# Altium PCB PCB1.PcbDoc
Units mil, origin at the board's own origin, x right, y up, seen from the top; angles counter-clockwise.
Board outline 2975 x 2360 mil, 2 copper layers (Top Layer, Bottom Layer); 81 components, 59 nets, 305 pads, 135 vias.
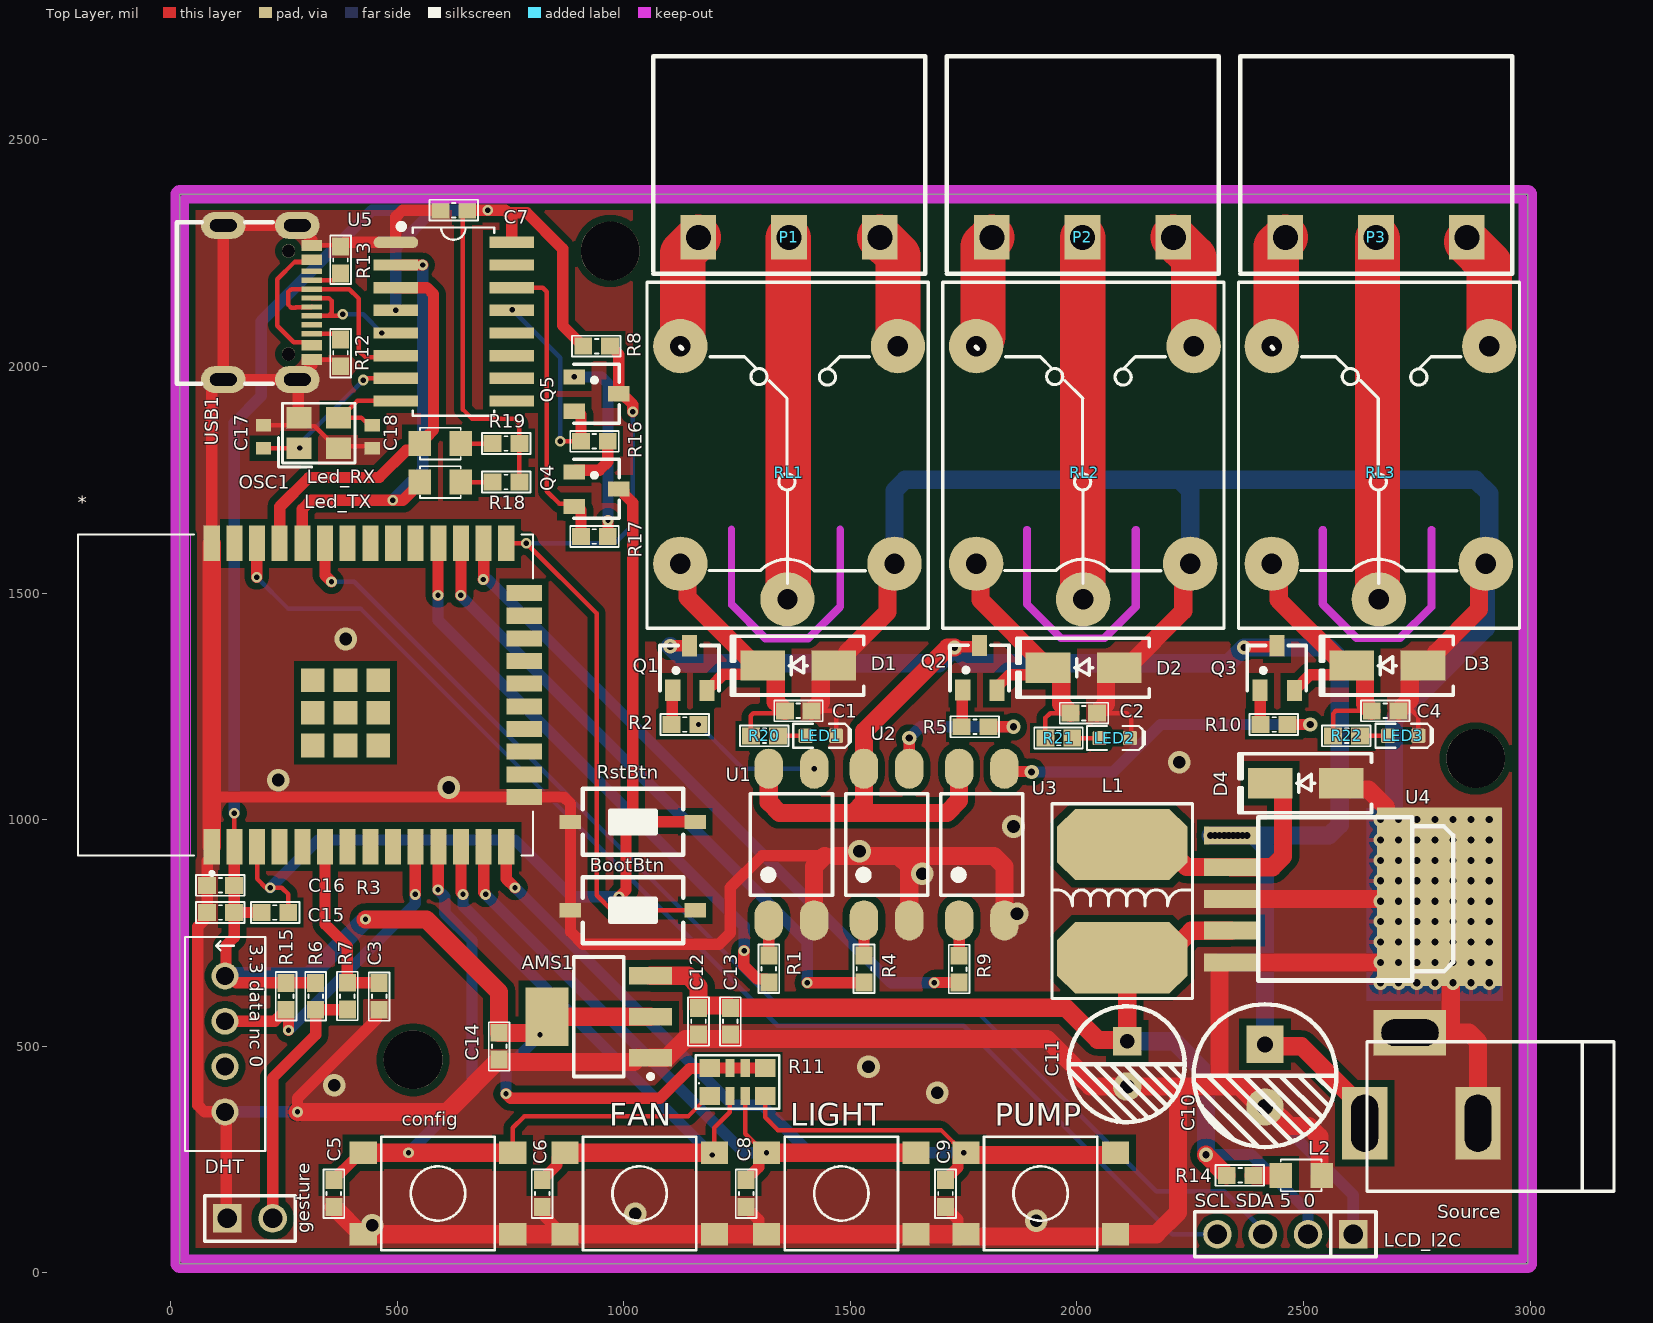
[diagram p0: Top Layer view]
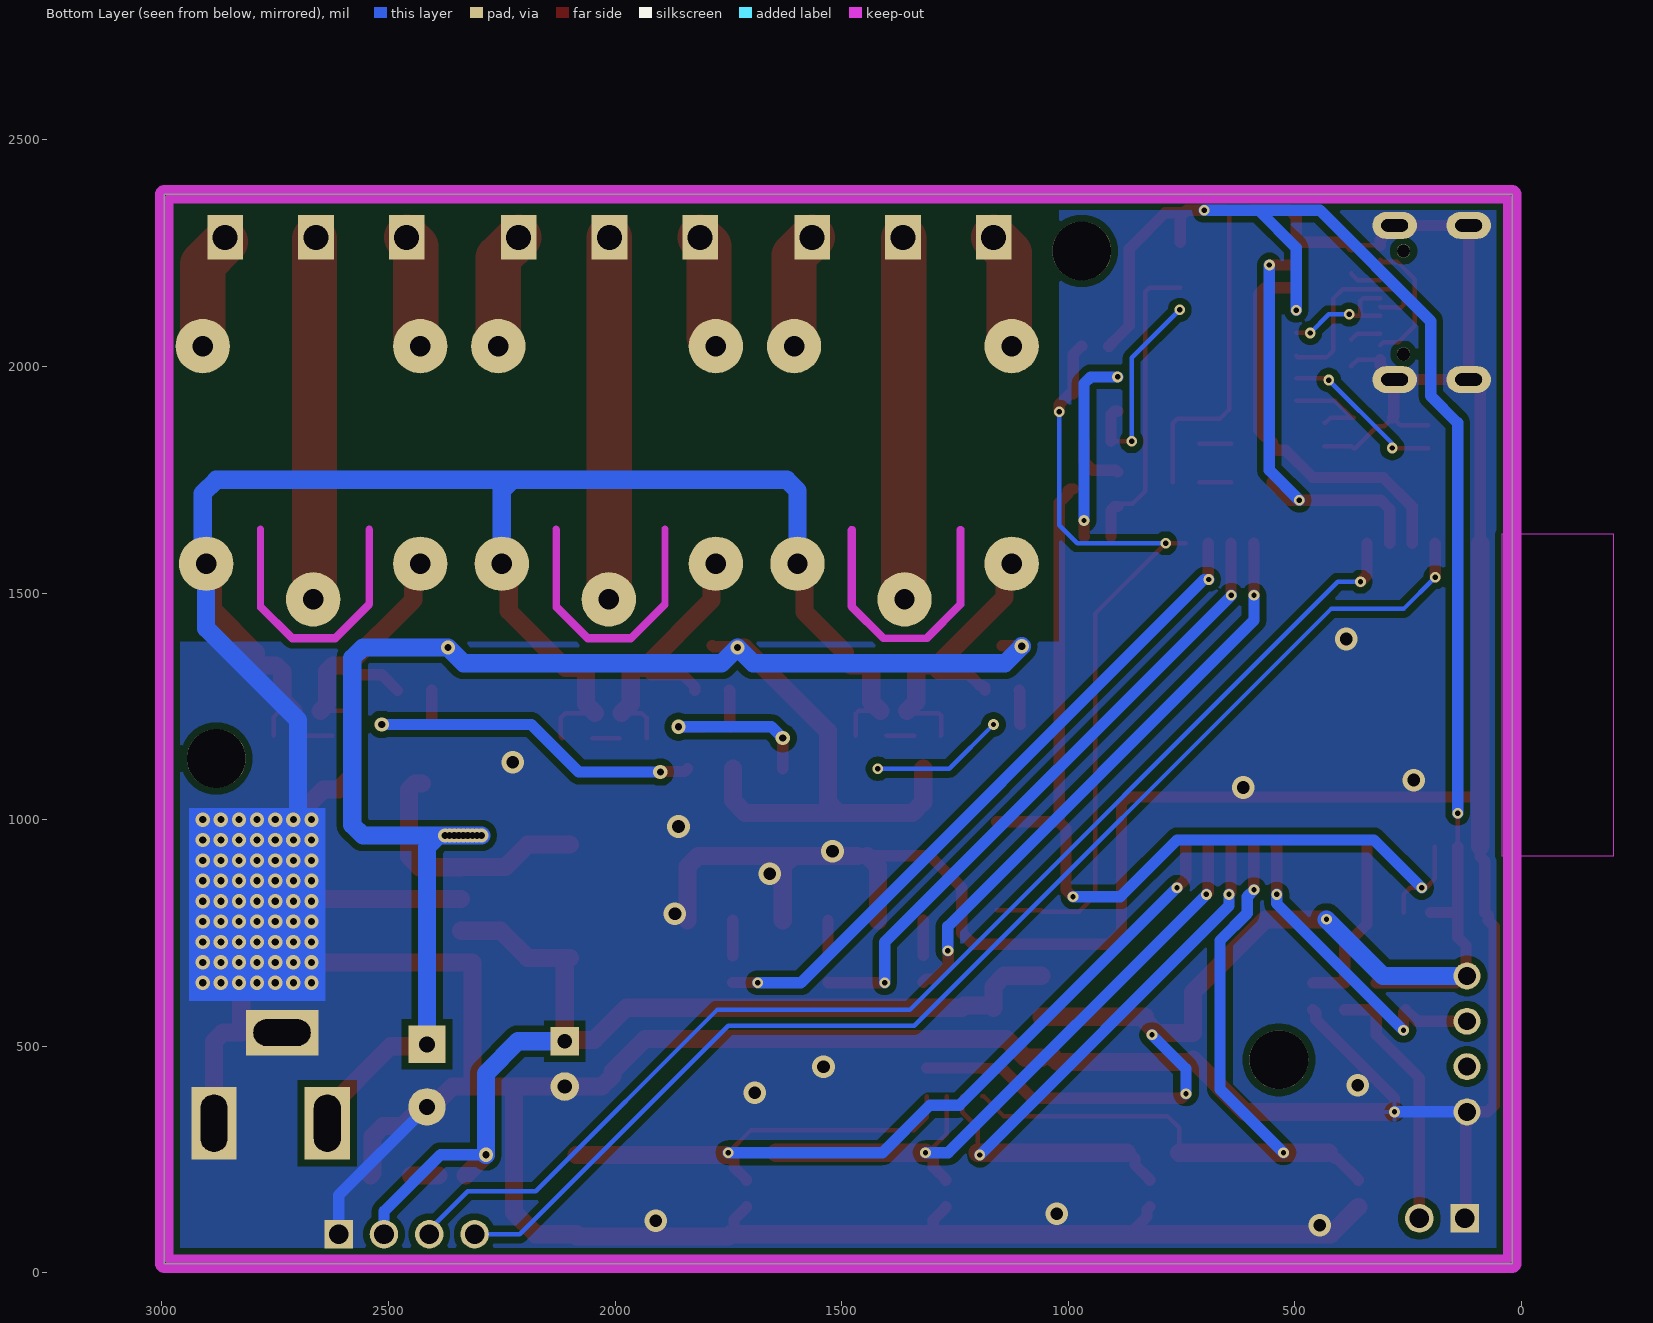
[diagram p1: Bottom Layer view, seen from below]

## Layer stack, top to bottom
Top Solder: solder mask 0.4, Solder Resist, Dk 3.5
Top Layer: signal copper 1.4
Dielectric 1: dielectric 12.6, FR-4, Dk 4.8
Bottom Layer: signal copper 1.4
Bottom Solder: solder mask 0.4, Solder Resist, Dk 3.5

## Board outline
20,2380 20,20 2995,20 2995,2380
cut-out: 2612.19,1394.69 2537.18,1469.7 cw(c2542.48,1474.99) 2534.98,1475 2534.98,1640 cw(c2542.5,1640) 2550.02,1640 2550.02,1478.11 2620.61,1407.51 2709.39,1407.51 2774.98,1473.11 2774.98,1640 cw(c2782.5,1640) 2790.02,1640 2790.02,1470 cw(c2782.5,1470) 2787.81,1464.69 2717.81,1394.68 cw(c2712.51,1399.98) 2712.5,1392.49 2617.5,1392.49 cw(c2617.5,1400)
cut-out: 1307.2,1394.68 ccw(c1312.49,1399.98) 1312.5,1392.49 1407.5,1392.49 ccw(c1407.5,1400) 1412.81,1394.69 1482.82,1464.7 ccw(c1477.52,1469.99) 1485.01,1470 1485.01,1640 ccw(c1477.5,1640) 1469.99,1640 1469.99,1473.11 1404.39,1407.51 1315.61,1407.51 1245.01,1478.11 1245.01,1640 ccw(c1237.5,1640) 1229.99,1640 1229.99,1475 ccw(c1237.5,1475) 1232.19,1469.69
cut-out: 1959.69,1394.69 1884.68,1469.7 cw(c1889.98,1474.99) 1882.48,1475 1882.48,1640 cw(c1890,1640) 1897.52,1640 1897.52,1478.11 1968.11,1407.51 2056.89,1407.51 2122.48,1473.11 2122.48,1640 cw(c2130,1640) 2137.52,1640 2137.52,1470 cw(c2130,1470) 2135.31,1464.69 2065.31,1394.68 cw(c2060.01,1399.98) 2060,1392.49 1965,1392.49 cw(c1965,1400)
cut-out: 1959.69,1394.69 1884.68,1469.7 cw(c1889.98,1474.99) 1882.48,1475 1882.48,1640 cw(c1890,1640) 1897.52,1640 1897.52,1478.11 1968.11,1407.51 2056.89,1407.51 2122.48,1473.11 2122.48,1640 cw(c2130,1640) 2137.52,1640 2137.52,1470 cw(c2130,1470) 2135.31,1464.69 2065.31,1394.68 cw(c2060.01,1399.98) 2060,1392.49 1965,1392.49 cw(c1965,1400)

## Design rules (kind name [scope] priority, off if disabled: settings)
Clearance [All] p1: gap=15 ignorepadtopadclearanceinfootprint=FALSE
PlaneConnect [All] p1: planeconnectstyle=Direct reliefexpansion=20 reliefentries=4 reliefconductorwidth=10 reliefairgap=10
PolygonConnect [All] p1: thpad.connectstyle=Direct thpad.reliefconductorwidth=10 thpad.reliefentries=4 thpad.polygonreliefangle="90 Angle" thpad.airgapwidth=10 smdpad.connectstyle=Direct smdpad.reliefconductorwidth=10 smdpad.reliefentries=4 smdpad.polygonreliefangle="90 Angle" smdpad.airgapwidth=10 via.connectstyle=Relief via.reliefconductorwidth=10 via.reliefentries=4 via.polygonreliefangle="90 Angle" via.airgapwidth=10
RoomDefinition Sheet1 [InComponentClass('Sheet1')] p1: confinementstyle=ConfineIn formatcopy=TRUE lockcomponents=FALSE outline -2240,-2505 -240,-2505 -240,-1505 -2240,-1505
RoutingVias [All] p1: holewidth=13.78 width=27.56 viastyle="Through Hole" minholewidth=11.81 minwidth=23.62 maxholewidth=15.75 maxwidth=31.5
SolderMaskExpansion [All] p1: expansion=4 istentingtop=FALSE
Width [All] p1: maxlimit=40 minlimit=10 preferedwidth=25
29 further rules are at their usual default settings.

## Components (designator, comment, footprint, x,y, rotation, side; value= is the part's Value field where it differs from the comment)
* "ESP32 WROOM 32" ESP32-WROOM-32D 297.72,1275 r90 top
AMS1 "AMS1117-3.3V" SOT223 945,565 r90 top value="AMS1117-3.3V SOT223"
BootBtn "Nut Nhan 2 Chan SMD 3x6x2.5" "Nut Nhan 2 Chan SMD 3x6x2.5" 1020,800 r0 top
C1 "470pF" "tu 0603" 1385,1240 r0 top
C2 "470pF" "tu 0603" 2015,1235 r0 top
C3 "102" "tu 0603" 460,610 r270 top
C4 "470pF" "tu 0603" 2680,1240 r0 top
C5 "102" "tu 0603" 360,175 r270 top
C6 "102" "tu 0603" 820,175 r270 top
C7 "104" "tu 0603" 625,2345 r180 top
C8 "102" "tu 0603" 1270,175 r270 top
C9 "102" "tu 0603" 1710,175 r270 top
C10 "330uF" "tu hoa 8mm" 2415,435 r270 top
C11 "220uF" "tu hoa 6.5mm" 2110,460 r270 top
C12 "104" "tu 0603" 1165,555 r270 top
C13 "103" "tu 0603" 1235,555 r270 top
C14 "104" "tu 0603" 725,500 r270 top
C15 "103" "tu 0603" 110,795 r180 top
C16 "103" "tu 0603" 110,855 r180 top
C17 "22pF" CAPC1608X09L 205,1845 r90 top
C18 "22pF" CAPC1608X09L 445,1845 r270 top
config "QuatButton" "Nut Nhan 4 Chan SMD 6x6" 590,175 r180 top (schematic designator BT1)
D1 "SS34" "DIODE SMA" 1385,1340 r180 top
D2 "SS34" "DIODE SMA" 2015,1335 r180 top
D3 "SS34" "DIODE SMA" 2685,1340 r180 top
D4 "SS34" "DIODE SMA" 2505,1080 r180 top
DHT "DHT11" SENSOR-DHT11 120,505 r270 top (schematic designator SENS-1)
FAN "DenButton" "Nut Nhan 4 Chan SMD 6x6" 1035,175 r180 top (schematic designator BT2)
gesture "JP 1x2 2.54" "JP 1x2 DT" 125,120 r0 top (schematic designator JP1)
L1 "47uH SMD" "Cuon Cam 7x7x5" 2100,970 r180 top
L2 "LED 0805" LED-0805-Red 2450,215 r0 top
LCD_I2C "LCD" "JP 1x4 DT" 2610,85 r180 top (schematic designator JP?)
LED1 "Green" LED-0603-GREEN 1435,1185 r0 top
LED2 "Green" LED-0603-GREEN 2083.46,1180 r0 top
LED3 "Green" LED-0603-GREEN 2720,1185 r0 top
Led_RX "LED 0805" LED-0805-Red 640,1830 r180 top (schematic designator L4)
Led_TX "LED 0805" LED-0805-Red 640,1745 r180 top (schematic designator L3)
LIGHT "BomButton" "Nut Nhan 4 Chan SMD 6x6" 1480,175 r180 top (schematic designator BT3)
OSC1 "OSC_SMD" "3525 OSC" 325,1855 r0 top
P1 "Bom" "CON 3 3EDG5.08" 1164.5,2285 r0 top
P2 "Quat" "CON 3 3EDG5.08" 1812.25,2285 r0 top
P3 "Den" "CON 3 3EDG5.08" 2460,2285 r0 top
PUMP "ConfigWifi" "Nut Nhan 4 Chan SMD 6x6" 1920,175 r180 top (schematic designator BT4)
Q1 "BC817" SOT-23 1145,1334.21 r0 top value=C9014
Q2 "BC817" SOT-23 1785,1335 r0 top value=C9014
Q3 "BC817" SOT-23 2441.2,1334.21 r0 top value=C9014
Q4 "BC817" SOT-23 940,1730 r270 top value=C9014
Q5 "BC817" SOT-23 940,1940 r270 top value=C9014
R1 "1k" "tro smd 0603" 1320,670.47 r90 top
R2 "4.7k" "tro smd 0603" 1135,1210 r180 top
R3 "10k" "tro smd 0603" 230,795 r0 top
R4 "1k" "tro smd 0603" 1530,670.47 r90 top
R5 "4.7k" "tro smd 0603" 1775,1205 r180 top
R6 "10k" "tro smd 0603" 320,610 r90 top
R7 "1k" "tro smd 0603" 390,610.47 r90 top
R8 "10k" "tro smd 0603" 940,2045 r180 top
R9 "1k" "tro smd 0603" 1740,670 r90 top
R10 "4.7k" "tro smd 0603" 2435,1210 r180 top
R11 "10k" "tro bang 0603 4" 1250,420 r90 top
R12 "5k1" "tro smd 0603" 375,2030 r270 top
R13 "5k1" "tro smd 0603" 375,2235 r90 top
R14 "1k" "tro smd 0603" 2360,215 r180 top
R15 "10k" "tro smd 0603" 255,610 r90 top
R16 "10k" "tro smd 0603" 935,1835 r0 top
R17 "10k" "tro smd 0603" 935,1625 r0 top
R18 "2k" "tro smd 0603" 740,1745 r0 top
R19 "2k" "tro smd 0603" 740,1830 r0 top
R20 "2k" "tro smd 0603" 1310.47,1185 r180 top
R21 "2k" "tro smd 0603" 1960,1180 r180 top
R22 "2k" "tro smd 0603" 2595,1185 r180 top
RL1 "Relay" "Relay 5 Chan SRD" 1361.22,1485.94 r90 top
RL2 "Relay" "Relay 5 Chan SRD" 2013.72,1485.94 r90 top
RL3 "Relay" "Relay 5 Chan SRD" 2666.22,1485.94 r90 top
RstBtn "Nut Nhan 2 Chan SMD 3x6x2.5" "Nut Nhan 2 Chan SMD 3x6x2.5" 1020,995 r0 top
Source "JACK DC 5.5" "JACK DC 5.5" 2760,430 r180 top locked value="Jac DC" (schematic designator "JACK DC1")
U1 "OPTO PC817 SMD" SOP4 1370,945 r90 top value=PC817
U2 "OPTO PC817 SMD" SOP4 1580,945 r90 top value=PC817
U3 "OPTO PC817 SMD" SOP4 1790,945 r90 top value=PC817
U4 "LM2576HVS 5.0V SMD" TO263-5 2570,825 r270 top
U5 "CH340C" SOIC16_50_284_25X90_SMT 625,2100 r0 top
USB1 "Type C 16P" "Type C 16P" 161.67,2158.03 r270 top

## Footprints (in the part's own frame and the unit in brackets; to place one, negate y for a bottom-side part, rotate by r counter-clockwise, add the part's x,y. Pads: shape width x height; smd on the part's side, far side on the other; paste and mask are expansions set on the pad)
"3525 OSC" [mm]
  rect 1.4x1.2 smd: 1(-1.053,-0.899) 2(1.147,-0.899) 3(1.147,0.801) 4(-1.053,0.801)
  silkscreen extent -2.21,-1.96 2.08,1.63, body extent -1.55,-1.32 1.65,1.2, height 1
CAPC1608X09L [mm]
  rect 0.7x0.85 smd: 1(-0.65,0) 2(0.65,0)
  body extent -0.85,-0.45 0.85,0.45, height 0.9
"CON 3 3EDG5.08" [mm]
  rect 2x2.5 hole 1.4: 1(0,0) 2(5.08,0) 3(10.173,0)
  silkscreen extent -2.54,-2.03 12.71,10.16, body extent -2.5,-1.75 12.67,10.25, height 3.15
"Cuon Cam 7x7x5" [mm] "Cuon Cam 7x7x5"
  oct 7.3x4 smd: 1(0,0.635) 2(0,6.985)
  silkscreen extent -3.94,-1.65 3.94,9.27, body extent -3.5,0.07 3.5,7.8, height 5.02
"DIODE SMA" [mm] "SMA"
  rect 2.5x1.7 smd: 1(-2,0) 2(2,0)
  silkscreen extent -3.68,-1.65 3.75,1.65, body extent -2.6,-1.37 2.6,1.37, height 2.4
ESP32-WROOM-32D [mm]
  rect 2x0.9 smd: 1(-8.5,5.26) 2(-8.5,3.99) 3(-8.5,2.72) 4(-8.5,1.45) 5(-8.5,0.18) 6(-8.5,-1.09) 7(-8.5,-2.36) 8(-8.5,-3.63) 9(-8.5,-4.9) 10(-8.5,-6.17) 11(-8.5,-7.44) 12(-8.5,-8.71) 13(-8.5,-9.98) 14(-8.5,-11.25) 25(8.5,-11.25) 26(8.5,-9.98) 27(8.5,-8.71) 28(8.5,-7.44) 29(8.5,-6.17) 30(8.5,-4.9) 31(8.5,-3.63) 32(8.5,-2.36) 33(8.5,-1.09) 34(8.5,0.18) 35(8.5,1.45) 36(8.5,2.72) 37(8.5,3.99) 38(8.5,5.26)
  rect 0.9x2 smd: 15(-5.715,-12.25) 16(-4.445,-12.25) 17(-3.175,-12.25) 18(-1.905,-12.25) 19(-0.635,-12.25) 20(0.635,-12.25) 21(1.905,-12.25) 22(3.175,-12.25) 23(4.445,-12.25) 24(5.715,-12.25)
  rect 1.33x1.33 smd: 39(-2.835,-2.24) 39(-2.835,-0.405) 39(-2.835,-4.075) 39(-1,-0.405) 39(-1,-4.075) 39(-1,-2.24) 39(0.835,-0.405) 39(0.835,-4.075) 39(0.835,-2.24)
  round 0 all layers, no hole: 39(-2.835,-1.322) 39(-2.835,-3.157) 39(-1.917,-2.24) 39(-1.917,-0.405) 39(-1.917,-4.075) 39(-1,-1.322) 39(-1,-3.157) 39(-0.082,-0.405) 39(-0.082,-2.24) 39(-0.082,-4.075) 39(0.835,-1.322) 39(0.835,-3.157)
  Keep-Out Layer region: 9,6.45 -9,6.45 -9,12.75 9,12.75
  Keep-Out Layer region: 9,6.45 -9,6.45 -9,12.75 9,12.75
  silkscreen extent -10.1,-12.75 9,12.75, body extent -9,-12.62 9,12.88, height 3.2
"JACK DC 5.5" [mil] "Jac DC input"
  rect 100x160 hole 59.06 slot 125.98 at 90 deg: 1(125,100) 2(-125,100)
  rect 160x100 hole 59.06 slot 125.98 at 0 deg: 3(25,-100)
  silkscreen extent -425,-80 120,250, body extent -410,-105 134,269, height 434
"JP 1x2 DT" [mm] "2 pins, 1 row, straight, gold plating"
  rect 1.6x1.6 hole 1.1: 1(0,0)
  round 1.6 hole 1.1: 2(2.54,0)
  silkscreen extent -1.27,-1.27 3.81,1.27, body extent -1.27,-1.27 3.81,1.27, height 8.54
"JP 1x4 DT" [mm] "4 pins, 1 row, straight, gold plating"
  rect 1.6x1.6 hole 1.1: 1(0,0)
  round 1.6 hole 1.1: 2(2.54,0) 3(5.08,0) 4(7.62,0)
  silkscreen extent -1.27,-1.27 8.89,1.27, body extent -1.27,-1.27 8.89,1.27, height 8.54
LED-0603-GREEN [mm]
  round 0.254 on Mech15: 0(0,0)
  rrect25% 0.8x0.8 smd: A(-0.85,0) K(0.85,0)
  Top Layer pour cut-out: -0.5,0.5 0.5,0.5 0.5,-0.5 -0.5,-0.5
  silkscreen extent -1.55,-0.67 1.68,0.67, body extent -0.8,-0.4 0.8,0.4, height 0.75
LED-0805-Red [mil]
  rect 50x55 smd: 1(0,0) 2(90,0)
  silkscreen extent 0,-35 90,35, body extent 5,-25 85,25, height 43
"Nut Nhan 2 Chan SMD 3x6x2.5" [mm] "Switch SMD type"
  rect 1.2x0.8 smd: 1(-3.5,0) 2(3.5,0)
  silkscreen extent -2.82,-1.85 2.82,1.85, body extent -3.05,-1.85 3.05,1.85, height 2.5
"Nut Nhan 4 Chan SMD 6x6" [mil] "SW SMD button 4pin, 250 x250 mil"
  rect 60x50 smd: 1(-165,90) 2(165,-90) 3(165,90) 4(-165,-90)
  silkscreen extent -125,-125 125,125, body extent -180,-125 180,125, height 130
"Relay 5 Chan SRD" [mil] "Relay SPDT, 5 pin, 10A,W 650mil, L 800mil, H 800mil"
  round 120 hole 45: 1(0,0) 2(559.06,236.22) 3(559.06,-243.78) 4(78.74,-236.22) 5(78.74,236.22)
  silkscreen extent -63,-311 700,310, body extent -55,-306 697,304, height 602
SENSOR-DHT11 [mm]
  round 1.508 hole 1: P$1(-3.81,0) P$2(-1.27,0) P$3(1.27,0) P$4(3.81,0)
  silkscreen extent -6,-2.25 6,2.25, body extent -6.25,-3 6.25,3, height 16
SOIC16_50_284_25X90_SMT [mm]
  oval 2.5x0.635 smd mask+0.076: 1(-3.25,4.42)
  rect 2.5x0.635 smd mask+0.076: 2(-3.25,3.15) 3(-3.25,1.88) 4(-3.25,0.61) 5(-3.25,-0.66) 6(-3.25,-1.93) 7(-3.25,-3.2) 8(-3.25,-4.47) 9(3.25,-4.47) 10(3.25,-3.2) 11(3.25,-1.93) 12(3.25,-0.66) 13(3.25,0.61) 14(3.25,1.88) 15(3.25,3.15) 16(3.25,4.42)
  silkscreen extent -3.07,-5.3 2.26,5.44, body extent -3.02,-4.97 2.98,4.93, height 1.4
SOP4 [mm]
  oval 2.25x1.6 smd: 1(-4.25,1.27) 2(-4.25,-1.27) 3(4.25,-1.27) 4(4.25,1.27)
  silkscreen extent -2.85,-2.3 2.85,2.3, body extent -4.67,-2.29 4.93,2.31, height 3.6
SOT223 [mm]
  rect 1x2.4 smd: 1(-2.3,-2.9) 2(0,-2.9) 3(2.3,-2.9)
  rect 3.3x2.4 smd: 4(0,2.9)
  silkscreen extent -3.47,-3.03 3.35,1.4, body extent -3.25,-3.56 3.25,3.4, height 1.68
SOT-23 [mm] "SOT 23 _ 1-3-2"
  rect 0.85x1.2 smd: 1(-0.94,-1.245) 2(0.985,-1.25) 3(0.005,1.25)
  silkscreen extent -1.65,-1.27 1.65,1.27, body extent -1.47,-1.33 1.53,1.17, height 1.06
TO263-5 [mil] "TO263-5"
  rect 39.37x120 smd: 1(-140,-230) 2(-70,-230) 3(0,-230) 4(70,-230) 5(140,-230)
  rect 393.7x275.59 smd: 6(-5,230)
  silkscreen extent -180,-170 180,260, body extent -200,-242 200,310, height 180
"tro bang 0603 4" [mil]
  rect 39.37x45.67 smd: 1(-30,60) 4(-30,-62) 5(32,-62) 8(32,60)
  rect 39.37x20 smd: 2(-30.06,16.08) 3(-30,-18.08) 6(32.06,-18.08) 7(32.06,16.08)
  silkscreen extent -58,-93 60,91, body extent -29,-64 33,62, height 22
"tro smd 0603" [mm] "Chip Capacitor, 2-Leads, Body 1,60x0,80mm, IPC Medium Density"
  rect 1x0.95 smd mask+0.076: 1(-0.75,0) 2(0.75,0)
  silkscreen extent -1.35,-0.58 1.37,0.58, body extent -0.82,-0.42 0.82,0.43, height 0.44
"tu 0603" [mm] "Chip Capacitor, 2-Leads, Body 1,60x0,80mm, IPC Medium Density"
  rect 1x0.95 smd mask+0.076: 1(-0.75,0) 2(0.75,0)
  silkscreen extent -1.35,-0.58 1.37,0.58, body extent -0.8,-0.4 0.8,0.4, height 0.9
"tu hoa 6.5mm" [mm]
  rect 1.6x1.6 hole 0.8: 1(-1.295,0.025)
  round 1.6 hole 0.8: 2(1.245,0.025)
  silkscreen extent -3.25,-3.25 3.25,3.25, body extent -3.15,-3.15 3.2,3.2, height 14.55
"tu hoa 8mm" [mm]
  rect 2.1x2.1 hole 0.9: 1(-1.75,0)
  round 2.1 hole 0.9: 2(1.75,0)
  silkscreen extent -4,-4 4,4, body extent -4.1,-4.07 4.1,4.13, height 13.81
"Type C 16P" [mm]
  oval 1.5x2.5 hole 0.7 slot 1.5 at 90 deg: 0(-3.893,2.998) 0(-3.893,-1.152) 0(4.747,2.998) 0(4.747,-1.152)
  rect 0.6x1.15 smd: A1(-2.773,3.793) A4(-1.973,3.793) A9(2.827,3.797) A12(3.627,3.797)
  rect 0.3x1.15 smd: A5(-0.823,3.798) A6(0.177,3.798) A7(0.677,3.796) A8(1.677,3.798) B5(2.177,3.798) B6(1.177,3.798) B7(-0.323,3.796) B8(-1.323,3.797)
  round 0.75 hole 0.75 unplated: ""(-2.463,2.498) ""(3.317,2.498)
  silkscreen extent -4.07,-3.75 4.98,1.62, body extent -4.02,-3.8 4.92,4.1, height 3.21

## Part data
AMS1: library part "AMS1117 SMD", "Dán", Chung_Loai=Dán, Don_Vi=Con, Ma_Hang=MH000596
C1 C2 C4: library part "Tu 0603 470pF 50V 10%", "Dán", Chung_Loai=Dán, Don_Vi=Con, Ma_Hang=MH004571, So_Chan=2, Ten_Linh_Kien="Tụ 0603 470P 50V 10%"
C3 C5 C6 C8 C9: library part "Tu 0603 102 50V 10%", "Dán", Chung_Loai=Dán, Don_Vi=Con, Ma_Hang=MH004566, So_Chan=2, Ten_Linh_Kien="Tụ 0603 102-1nF 10% 50V"
C7 C12 C14: library part "Tu 0603 104 50V 10%", "Dán", Chung_Loai=Dán, Don_Vi=Con, Ma_Hang=MH004568, So_Chan=2, Ten_Linh_Kien="Tụ 0603 104-100nF 10% 50V"
C10: library part "Tu Hoa 330uF 25V 8x11", "Cắm", Chung_Loai=Cắm, Don_Vi=Con, Ma_Hang=MH006566, So_Chan=2, Ten_Linh_Kien="Tụ Hóa 330nF 25V 8x11MM"
C11: library part "Tu Hoa 220uF 16V 7x11", "Cắm", Chung_Loai=Cắm, Don_Vi=Con, Ma_Hang=MH008416, So_Chan=2, Ten_Linh_Kien="Tụ Hóa 220uF 16V 7x11MM"
C13 C15 C16: library part "Tu 0603 103 50V 10%", "Dán", Chung_Loai=Dán, Don_Vi=Con, Ma_Hang=MH004567, So_Chan=2, Ten_Linh_Kien="Tụ 0603 103-10nF 10% 50V"
C17 C18: library part GRM1885C1H222JA01D, "CAP CER 2200PF 50V NP0 0603", Capacitance=2200pF, Manufacturer="Murata Electronics North America", Operating Temperature="-55°C ~ 125°C", Package / Case="0603 (1608 Metric)", Ratings=-, Supplier Part Number 1=490-1459-1-ND, Temperature Coefficient="C0G, NP0", Tolerance=±5%, Voltage - Rated=50V, Applications="General Purpose", Category=Capacitors, ComponentLink1Description=http://www.murata.com/~/media/webrenewal/support/library/catalog/products/capacitor/mlcc/c02e.ashx, ComponentLink1URL=http://www.murata.com/~/media/webrenewal/support/library/catalog/products/capacitor/mlcc/c02e.ashx, Features=-, Height - Seated (Max)=-, Lead Spacing=-, Lead Style=-, Mounting Type="Surface Mount, MLCC", Packaging="Cut Tape (CT)", Part Status=Active, Pricing 1="1=0.11, 10=0.08, 25=0.058, 50=0.0434, 100=0.0355, 250=0.02972, 500=0.02536, 1000=0.01992 (USD)", RoHS="RoHS Compliant", Size / Dimension="0.063\" L x 0.031\" W (1.60mm x 0.80mm)", Stock 1=850589, Supplier 1=Digi-Key, Thickness (Max)="0.035\" (0.90mm)"
config FAN LIGHT PUMP: library part "Nut Nhan 4 Chan SMD 6x6", "Nut Nhan 4 Chan 6.2x6.2x3.5", Ma_Hang=MH002424, Ten="Nút Nhấn 4 Chân 6.2x6.2x3.1MM SMD"
D1 D2 D3 D4: library part "Diode SS34 ( 1N5822 )", "Dán", Chung_Loai=Dán, Don_Vi=Con, Ma_Hang=MH002104, Ten_Linh_Kien="Diode SS34 3A 40V SMA ( 1N5822 SS34A)"
DHT: "Temperature Humidity Sensor 16bi", Package=None, Check_prices=https://www.snapeda.com/parts/DHT11/Aosong+Electronics/view-part/?ref=eda, MF=aosong, MP=DHT11, SnapEDA_Link=https://www.snapeda.com/parts/DHT11/Aosong+Electronics/view-part/?ref=snap
gesture: library part "JP 1x2 2.54 Duc Thang", "Cắm", Chung_Loai=Cắm, Don_Vi=Con, Ma_Hang=MH000903, Ten_Linh_Kien="Jump Đơn Đực 2.54MM 1x40P Thẳng 11MM"
L1: library part "CUON CAM 47uH SMD", "Dán", Chung_Loai=Dán, Don_Vi=Con, Ma_Hang=MH004211, Ten_Linh_Kien="Cuộn Cảm 47uH 7x7x4MM CD74R"
L2 Led_RX Led_TX: library part "LED 0805 Do", "Dán", Chung_Loai=Dán, Don_Vi=Con, Ma_Hang=MH000897, Ten_Linh_Kien="LED 0805 Màu Đỏ (Red)"
LCD_I2C: library part "JP 1x4 2.54 Duc Thang", "Cắm", Chung_Loai=Cắm, Don_Vi=Con, Ma_Hang=MH000903, Ten_Linh_Kien="Jump Đơn Đực 2.54MM 1x40P Thẳng 11MM"
LED1 LED2 LED3: library part LTST-C190KGKT, "LED GREEN CLEAR 0603 SMD", Current - Test=20mA, Lens Color=Colorless, Manufacturer="Lite-On Inc.", Millicandela Rating=35mcd, Package / Case="0603 (1608 Metric)", Supplier Part Number 1=160-1435-1-ND, Voltage - Forward (Vf) (Typ)=2V, Category=Optoelectronics, Color=Green, ComponentLink1Description=http://optoelectronics.liteon.com/upload/download/DS22-2000-074/S_110_LTST-C190KGKT.pdf, ComponentLink1URL=http://optoelectronics.liteon.com/upload/download/DS22-2000-074/S_110_LTST-C190KGKT.pdf, Features=-, Height (Max)=0.80mm, Lens Style/Size="Rectangle with Flat Top, 1.10mm x 0.80mm", Lens Transparency=Clear, Manufacturer Part Number=LTST-C190KGKT, Mounting Type="Surface Mount", Packaging="Cut Tape (CT)", Part Status=Active, Pricing 1="1=0.27, 10=0.196, 25=0.1448, 100=0.1034, 250=0.07032, 500=0.06204, 1000=0.0486 (USD)", RoHS="RoHS Compliant", Size / Dimension="1.60mm L x 0.80mm W", Stock=922756, Supplier 1=Digi-Key, Viewing Angle=130°, Wavelength - Dominant=571nm, Wavelength - Peak=574nm
P1 P2 P3: library part "CON 3 EDG5.08", "Cắm", Chung_Loai=Cắm, Don_Vi=Con, Ma_Hang=MH000760, Ten_Linh_Kien="CON 3 2EDG5.08-3P 5.08MM ( Xanh Cong)"
Q1 Q2 Q3 Q4 Q5: library part "Trans BC817", "SOT-23 - C8658"
R1 R4 R7 R9 R14: library part "Tro 0603 5% 1k", "Dán", Chung_Loai=Dán, Don_Vi=Con, Ma_Hang=MH006319, So_Chan=2, Ten_Linh_Kien="Trở 0603 5% 1k"
R2 R5 R10: library part "Tro 0603 5% 4.7k", "Dán", Chung_Loai=Dán, Don_Vi=Con, Ma_Hang=MH006327, So_Chan=2, Ten_Linh_Kien="Trở 0603 5% 4.7k"
R3 R6 R8 R15 R16 R17: library part "Tro 0603 5% 10k", "Dán", Chung_Loai=Dán, Don_Vi=Con, Ma_Hang=MH006316, So_Chan=2, Ten_Linh_Kien="Trở 0603 5% 10k"
R11: library part "Tro bang 0603 10k", "Dán", Chung_Loai=Dán, Don_Vi=Con, Ma_Hang=MH001444, So_Chan=8, Ten_Linh_Kien="Trở băng 0603x4 10k"
R12 R13: library part "Tro 0603 5% 51k", "Dán", Chung_Loai=Dán, Don_Vi=Con, Ma_Hang=MH007666, So_Chan=2, Ten_Linh_Kien="Trở 0603 5% 51k"
R18 R19 R20 R21 R22: library part "Tro 0603 5% 2k", "Dán", Chung_Loai=Dán, Don_Vi=Con, Ma_Hang=MH006324, So_Chan=2, Ten_Linh_Kien="Trở 0603 5% 2k"
RL1 RL2 RL3: library part "Relay 5 Chan SRD", "Relay 5 Chan", Ma_Hang=MH009374, Ten="Relay 5V10A SRD-05VDC-SL-C Chính Hãng"
U1 U2 U3: "Single Opto"
U4: "Dán", Chung_Loai=Dán, Don_Vi=Con, Ma_Hang=MH002362, Ten_Linh_Kien="LM2576HVS-5.0V BUCK 5V 3A TO263-5"
U5: "USB Bridge, USB to UART USB 2.0 UART Interface", Alternate Part Number-1=NA, Case/Package=SOIC16, Manufacturer=Olimex, Supplier Part Number-1=C84681, Manufacturer Part Number=CH340C, Supplier-1=LCSC
BootBtn RstBtn: Ma_Hang=MH001036, Ten="Nút Nhấn 2 Chân 3x6x2.5MM SMD"

## Free pads (board coordinates)
  round 129.92 hole 129.92: 11(535,470) 11(970,2255) 11(2880,1135)

## Via types
v1: diameter 31.5, hole 15.75, Top Layer to Bottom Layer, tented both sides, 80 vias
v2: diameter 23.62, hole 11.81, Top Layer to Bottom Layer, tented both sides, 41 vias
v3: diameter 50, hole 28, Top Layer to Bottom Layer, tented both sides, 14 vias

## Nets (pads, with @x,y where several pads share a name; then routed paths per layer and width w, separated by ;. In a path a pad name is that pad's centre, name@x,y a point inside that pad or via, vN(x,y) a via of type N, cw(c..) or ccw(c..) an arc to the next point about the centre after c; other vN are vias at no path point)
+5: AMS1.3 C11.1 C12.1 C13.1 L1.2 LCD_I2C.2 R14.2 U4.4 | length 2362.4
  Top Layer w40: AMS1.3 1141.57,655.55 1165,632.12 C12.1 1170.47,590 1229.53,590 C13.1 1235.47,585 1975,585 2046.08,513.92 2108.08,513.92 C11.1 2111,684 L1.2 2192.61,695 2252.3,754.69 2339.69,754.69 U4.4 ; v1(2285,260.47) R14.2
  Bottom Layer w25: v1(2285,260.47) 2385.05,260.47 2510,135.52 LCD_I2C.2@2510,95
  Bottom Layer w40: C11.1 2214,511 2285,440 v1(2285,260.47)
+12: C10.1 Q1.3 Q2.3 Q3.3 Source.1 U1.4 U2.4 U3.4 U4.1 | length 4215.6
  Top Layer w25: v1(1102.51,1382.51) 1103.43,1383.43 Q1.3 ; v1(1730,1380) 1731.24,1381.24 1782.23,1381.24 Q2.3 ; v1(2368.82,1380) 2370.06,1381.24 2439.22,1381.24 Q3.3
  Top Layer w40: U1.4 1320,1038.43 1343.43,1015 1506.57,1015 ; v1(1730,1380) 1715,1380 1530,1195 U2.4 1530,1038.43 1506.57,1015 ; U3.4 1740,1041.94 1713.06,1015 1506.57,1015 ; C10.1 2418.9,500 2495,500 2635,360 Source.1
  Bottom Layer w40: v1(1102.51,1382.51) 1140.03,1345 1695,1345 v1(1730,1380) 1765,1345 2333.82,1345 v1(2368.82,1380) 2556.57,1380 2580,1356.57 2580,988.43 2556.57,965 v1@2390,965 ; v1(2295,965) v1(2305,965) v1(2315,965) v1(2325,965) v1(2335,965) v1(2345,965) v1(2355,965) v1(2365,965) v1(2375,965) v1@2390,965 ; C10.1 2415,940 v1@2390,965
BOOT: *.25 BootBtn.2 Q5.3 R8.1 | length 1791.7
  Top Layer w10: *.25 784.65,1609.65 v2(785,1610) 940,1455 940,833.06 976.05,797.01 1056.12,797.01 1059.11,800 BootBtn.2
  Top Layer w25: R8.1 970.51,2045 989.21,2026.3 Q5.3 996.1,1939.8 1020,1915.9 v2(1020,1900)
  Bottom Layer w10: v2(785,1610) 980,1610 1020,1650 v2(1020,1900)
config: *.11 C5.1 config.2 config.4 R11.1 | length 1704.3
  Top Layer w10: config.4 755,320 780,345 1141.85,345 1186.85,390 R11.1
  Top Layer w25: C5.1 360,205.51 406.99,252.5 412.5,252.5 config.2 ; v2(590,845) 590.63,845.63 *.11
  Top Layer w40: config.2 v2(525,265) config.4
  Bottom Layer w25: v2(525,265) 665,405 665,733.43 605,793.43 605,830 v2(590,845)
data: *.10 DHT.P$2 R15.1 | length 715.3
  Top Layer w25: DHT.P$2 229.53,555 247.81,573.29 248.8,573.29 255,579.49 R15.1 260,575.47 v2(260,535) ; v2(540,835) 540,939.72 *.10
  Bottom Layer w25: v2(260,535) 540,815 v2(540,835)
DTR: Q5.2 R16.1 U5.13 | length 457.1
  Top Layer w10: U5.13 v2(753.93,2125) ; v2(860,1835) R16.1
  Top Layer w25: Q5.2 897.68,1901.2 905.47,1893.41 R16.1
  Bottom Layer w10: v2(753.93,2125) 860,2018.93 v2(860,1835)
ENABLE: *.3 Q4.3 R3.2 RstBtn.2 | length 2127.3
  Top Layer w10: *.3 190.63,869.37 210,850 v2(220,850) 245,850 260,835 260,795.47 R3.2
  Top Layer w25: Q4.3 996.1,1729.8 1000.34,1725.57 1000.34,1718.68 1020,1699.01 1020,995 ; v2(989.51,829.51) 1005,845 1005,980 1020,995 ; RstBtn.2 1020,995
  Bottom Layer w25: v2(220,850) 325,955 760,955 885.49,829.51 v2(989.51,829.51)
fan: *.27 R4.1 | length 1412.2
  Top Layer w25: v2(640,1495) 640.63,1495.63 *.27 ; v2(1405,640) 1529.06,640 R4.1
  Bottom Layer w25: v2(640,1495) 1405,730 v2(1405,640)
FanBtn: *.12 C6.1 FAN.2 FAN.4 R11.2 | length 1470.2
  Top Layer w10: FAN.4 1200,320 1233.92,353.92 R11.2
  Top Layer w25: *.12 640.63,839.37 v2(645,835) ; C6.1 820,205.51 852.5,238.01 852.5,252.5 865,265 FAN.2 ; v2(1195,260) FAN.4
  Top Layer w40: FAN.2 FAN.4
  Bottom Layer w25: v2(645,835) 645,810 v2(1195,260)
GND: *.1 *.15 *.38 AMS1.1 BootBtn.1 C1.2 C2.2 C3.2 C4.2 C5.2 C6.2 C7.2 C8.2 C9.2 C10.2 C11.2 C12.2 C13.2 C14.2 C15.2 C16.2 C17.2 C18.2 config.1 config.3 D1.1 D2.1 D3.1 D4.1 DHT.P$4 FAN.1 FAN.3 gesture.1 L2.2 LCD_I2C.1 LED1.K LED2.K LED3.K LIGHT.1 LIGHT.3 OSC1.2 OSC1.4 PUMP.1 PUMP.3 R12.2 R13.2 RL1.4 RL2.4 RL3.4 RstBtn.1 Source.2 Source.3 U1.2 U2.2 U3.2 U4.3 U4.5 U4.6 U5.1 USB1.0 USB1.A1 USB1.A12 | length 18203.1
  Top Layer w10: C17.2 267.6,1870.59 OSC1.4 302.18,1867.93 317.93,1867.93 366.24,1819.62 OSC1.2 374.96,1824.41 C18.2@435,1824.41 ; USB1.A1 R13.2@372.32,2267.21 ; USB1.A12 361.22,2015.24 375,2001.46 R12.2 ; C1.2 1462.61,1240 1468.46,1234.14 LED1.K ; C2.2 2110,1235 2120,1225 2120,1183.07 LED2.K ; C4.2 2740,1240 2753.46,1226.54 LED3.K
  Top Layer w25: *.1 90.63,918.7 80.47,908.54 C16.2 C15.2 79.49,795 73.29,788.8 73.29,777.63 60,764.34 60,369.64 74.64,355 DHT.P$4 122.5,352.5 122.5,122.5 gesture.1 ; 90.63,1055 95.63,1050 *.15 867.56,1050 882.2,1035.36 RstBtn.1 BootBtn.1 882.2,752.8 910,725 1210,725 1235,750 1235,850 1305,920 1443.43,920 1465,920 ; *.38 90.63,1955.41 106.36,1971.15 USB1.0@116.3,1971.15 ; v2(280,355) 280,385 453.8,558.8 453.8,574.27 C3.2 ; OSC1.4 281.62,1888.49 281.62,1969.21 USB1.0@279.68,1971.15 ; USB1.A1 311.02,2279.97 305.89,2285.1 305.89,2295.57 290.15,2311.31 279.68,2311.31 116.3,2311.31 USB1.0@116.3,1971.15 ; USB1.A12 311.18,2002.64 305.89,1997.35 305.89,1986.88 290.15,1971.15 USB1.0@279.68,1971.15 ; R13.2 375,2265.51 383.51,2274.02 U5.1 497.05,2330.36 511.69,2345 C7.2 ; C6.2 826.2,139.27 826.2,123.8 FAN.3@865,85 ; C8.2 1270,144.49 1297.5,116.99 1297.5,97.5 1310,85 LIGHT.3 ; C9.2 1710,144.49 1737.5,116.99 1737.5,92.5 PUMP.3@1745,85 ; USB1.0@116.3,1971.15 USB1.0@279.68,1971.15
  Top Layer w40: *.1 90.63,1055 *.38 ; v2(280,355) 609.53,355 C14.2 730.47,465 1022.8,465 AMS1.1@1032.24,474.45 ; C5.2 360,145 config.3@420,85 ; config.3 config.1 865,85 FAN.3 FAN.1 LIGHT.3@1310,85 ; AMS1.1 1094.45,474.45 1135.94,515.94 1934.06,515.94 2006,444 2006,434.43 2029.43,411 C11.2 2230,411 ; LIGHT.3 LIGHT.1 1745,85 1750,80 PUMP.1@2085,80 ; C1.2 1434.53,1260 1434.53,1326.54 1447.99,1340 D1.1 1479.49,1340 1492.95,1353.46 1492.95,1369.21 1582.13,1458.39 1582.13,1549.38 RL1.4 ; U1.2 1420,896.57 1443.43,920 ; 1465,920 1520,920 1606.57,920 ; U2.2 1630,896.57 1606.57,920 ; U3.2 1840,896.57 1816.57,920 1606.57,920 ; C2.2 2064.53,1255 2064.53,1321.54 2077.99,1335 D2.1 2109.49,1335 2234.63,1460.15 2234.63,1549.38 RL2.4 ; PUMP.1 2175,85 2223.43,133.43 2223.43,404.43 2230,411 ; U4.3 2795,825 U4.6 ; L2.2 2535,220 2535,300.09 2511.57,323.52 2469.13,323.52 2426.55,366.1 C10.2 2403.45,366.1 2358.55,411 2315,411 ; D4.1@2582.48,1093.46 2609.41,1066.54 2643.46,1066.54 2682.2,1027.8 2682.2,947.8 U4.6 ; C4.2 2734.53,1265 2734.53,1326.54 2747.99,1340 D3.1 2779.49,1340 2792.95,1353.46 2792.95,1369.21 2887.13,1463.39 2887.13,1549.38 RL3.4 ; Source.2 2885,510 2865,530 2825,530 2825,805 U4.6 ; 2230,411 2315,411 ; 2315,411 2315,684.69 2315.31,685 U4.5 v1(2670,685) 2682.2,685 2800,802.8 U4.6
  Bottom Layer w25: DHT.P$4 v2(280,355) ; C10.2 2610,171.1 LCD_I2C.1@2610,95
  Bottom Layer w40: RL1.4 1597.44,1726.57 1620.87,1750 2226.51,1750 ; RL2.4 2249.94,1726.57 2226.51,1750 ; v1(2710,1000) 2700,1010 2700,1220 2902.44,1422.44 RL3.4 2910,1572.24 2910,1720 2880,1750 2226.51,1750 ; v1(2870,1000) v1(2910,1000)
  other v1: 2670,640 2710,640 2750,640 2790,640 2830,640 2870,640 2910,640 2710,685 2750,685 2790,685 2830,685 2870,685 2910,685 2670,730 2710,730 2750,730 2790,730 2830,730 2870,730 2910,730 2670,775 2710,775 2750,775 2790,775 2830,775 2870,775 2910,775 2670,820 2710,820 2750,820 2790,820 2830,820 2870,820 2910,820 2670,865 2710,865 2750,865 2790,865 2830,865 2870,865 2910,865 2670,910 2710,910 2750,910 2790,910 2830,910 2870,910 2910,910 2670,955 2710,955 2750,955 2790,955 2830,955 2870,955 2910,955 2670,1000 2750,1000 2790,1000 2830,1000
  other v3: 445,105 1910,115 1025,130 1691.44,397.59 360.79,413.84 1540,455 1867.93,792.37 1658.93,880.61 1520,930 1860,985 613.91,1071.04 237.71,1087.29 2225.55,1126.77 386.33,1398.48
light: *.26 R9.1 | length 1498.8
  Top Layer w25: v2(690,1530) 690.63,1530.63 *.26 ; v2(1685,640) 1685.47,640.47 R9.1
  Bottom Layer w25: v2(690,1530) 700,1530 1590,640 v2(1685,640)
LightBtn: *.13 C8.1 LIGHT.2 LIGHT.4 R11.3 | length 1509.4
  Top Layer w10: R11.3 1268.08,306.92 1297.5,277.5 LIGHT.2@1297.5,252.5 ; 1425,265 1430,270
  Top Layer w25: *.13 690.63,839.37 v2(695,835) ; C8.1 1270,205.51 1297.5,233.01 LIGHT.2@1297.5,252.5
  Top Layer w40: v2(1315,265) 1425,265 LIGHT.4
  Bottom Layer w25: v2(695,835) 1265,265 v2(1315,265)
NetC1_1: C1.1 D1.2 Q1.2 R20.2 RL1.5 | length 712.4
  Top Layer w10: R20.2 1280,1185.94 1280,1229.14 1285.86,1235 1350.47,1235 C1.1
  Top Layer w25: Q1.2 1183.8,1291.89 1188.03,1296.12 1194.92,1296.12 1219.55,1320.75 1287.01,1320.75 D1.2
  Top Layer w40: RL1.5 1140.31,1549.38 1140.31,1490.2 1290.51,1340 D1.2 1322.01,1340 1335.47,1326.54 1335.47,1260 C1.1
NetC2_1: C2.1 D2.2 Q2.2 R21.2 RL2.5 | length 665.8
  Top Layer w10: R21.2 1930.47,1224.53 1940.94,1235 C2.1
  Top Layer w25: Q2.2 1823.8,1292.68 1851.12,1320 1921.26,1320 D2.2
  Top Layer w40: RL2.5 1786.89,1555.29 1786.89,1484.37 D2.2 1952.01,1335 1965.47,1321.54 1965.47,1255 C2.1
NetC4_1: C4.1 D3.2 Q3.2 R22.2 RL3.5 | length 720.1
  Top Layer w10: R22.2 2565.47,1234.14 2571.33,1240 C4.1
  Top Layer w25: Q3.2 2515,1320 2586.26,1320 D3.2
  Top Layer w40: RL3.5 2445.31,1549.38 2445.31,1485.2 2590.51,1340 D3.2 2622.01,1340 2635.47,1326.54 2635.47,1255 C4.1
NetC17_1: C17.1 OSC1.1 U5.7 | length 360.4
  Top Layer w10: C17.1 205.21,1819.62 OSC1.1 ; v2(425,1970) 429.02,1974.02 U5.7
  Bottom Layer w10: v2(285,1820) 285,1830 v2(425,1970)
NetC18_1: C18.1 OSC1.3 U5.8 | length 207.8
  Top Layer w10: OSC1.3 OSC1.3@374.11,1886.55 ; C18.1@435,1875.59 432.05,1875.59 421.09,1886.55 OSC1.3@374.11,1886.55 ; U5.8 411.58,1924.02 OSC1.3@374.11,1886.55
NetD4_2: D4.2 L1.1 U4.2 | length 567.8
  Top Layer w40: L1.1 2192.61,945 2242.3,895.31 2339.69,895.31 U4.2 2431.57,895 2455,918.43 2455,1066.54 2441.54,1080 D4.2
NetJP1_2: gesture.2 R6.1 R7.1 | length 570
  Top Layer w25: gesture.2 225,430 320,525 R6.1 320.24,580.71 389.76,580.71 R7.1
NetL2_1: L2.1 R14.1 | length 60.5
  Top Layer w40: R14.1 L2.1
NetL3_1: Led_TX.1 R18.1 | length 70.5
  Top Layer w10: Led_TX.1 R18.1
NetL4_1: Led_RX.1 R19.1 | length 70.5
  Top Layer w10: Led_RX.1 R19.1
NetLED1_A: LED1.A R20.1 | length 61.5
  Top Layer w10: R20.1 LED1.A
NetLED2_A: LED2.A R21.1 | length 60.5
  Top Layer w10: R21.1 LED2.A
NetLED3_A: LED3.A R22.1 | length 62
  Top Layer w10: R22.1 LED3.A
NetP1_1: P1.1 RL1.2 | length 277.8
  Top Layer w40: RL1.2 RL1.2@1130,2050 ; 1130,2165 1145.13,2180.13
  Top Layer w100: RL1.2@1130,2050 1130,2165 1130,2250.5 P1.1
NetP1_2: P1.2 RL1.1 | length 800.4
  Top Layer w40: RL1.1 RL1.1@1362.86,1487.58 ; P1.2@1362.86,2283.36 P1.2
  Top Layer w100: RL1.1@1362.86,1487.58 P1.2@1362.86,2283.36
NetP1_3: P1.3 RL1.3 | length 269
  Top Layer w40: RL1.3 RL1.3@1605,2066.65
  Top Layer w100: P1.3 1605,2245 RL1.3@1605,2054.24
NetP2_1: P2.1 RL2.2 | length 281.9
  Top Layer w40: 1792.81,2156.34 1812.25,2175.79
  Top Layer w100: RL2.2 1777.5,2050.41 1792.81,2065.72 1792.81,2156.34 1792.81,2265.56 P2.1
NetP2_2: P2.2 RL2.1 | length 799.7
  Top Layer w40: P2.2 P2.2@2012.99,2284.26 ; RL2.1@2012.99,1486.68 RL2.1
  Top Layer w100: RL2.1@2012.99,1486.68 P2.2@2012.99,2284.26
NetP2_3: P2.3 RL2.3 | length 270.9
  Top Layer w40: RL2.3 RL2.3@2257.5,2066.65
  Top Layer w100: P2.3 2257.5,2240.25 RL2.3@2257.5,2054.24
NetP3_1: P3.1 RL3.2 | length 280.7
  Top Layer w40: 2440,2165 2460,2185
  Top Layer w100: RL3.2 2430,2050.41 2440,2060.41 2440,2165 2440,2265 P3.1
NetP3_2: P3.2 RL3.1 | length 801.6
  Top Layer w40: P3.2 P3.2@2663.11,2281.89 ; RL3.1@2663.11,1489.06 RL3.1
  Top Layer w100: RL3.1@2663.11,1489.06 P3.2@2663.11,2281.89
NetP3_3: P3.3 RL3.3 | length 260.5
  Top Layer w40: P3.3@2860.5,2275.16 P3.3
  Top Layer w100: P3.3@2860.5,2275.16 2910,2225.66 RL3.3
NetQ1_1: Q1.1 R2.2 | length 76.3
  Top Layer w25: R2.2 1106.74,1211.26 1106.74,1283.95 Q1.1
NetQ2_1: Q2.1 R5.2 | length 82
  Top Layer w25: R5.2 1746.74,1206.26 1746.74,1284.74 Q2.1
NetQ3_1: Q3.1 R10.2 | length 75.7
  Top Layer w25: Q3.1 2404.84,1284.58 2404.84,1210.64 R10.2
NetQ4_1: Q4.1 R16.2 | length 128.3
  Top Layer w25: Q4.1 895.23,1771.23 946.23,1771.23 964.53,1789.53 R16.2
NetQ5_1: Q5.1 R17.2 | length 417.6
  Top Layer w25: R17.2 965,1625.47 v2(965,1660)
  Bottom Layer w25: v2(891,1977) 950.36,1977 965,1962.36 v2(965,1660)
NetR1_2: R1.2 U1.1 | length 77.7
  Top Layer w25: R1.2 U1.1
NetR2_1: R2.1 U1.3 | length 295.5
  Bottom Layer w10: v2(1165,1210) 1262.68,1112.32 v2(1420,1112.32)
NetR4_2: R4.2 U2.1 | length 77.7
  Top Layer w25: R4.2 U2.1
NetR5_1: R5.1 U2.3 | length 363.5
  Top Layer w25: U2.3 v1(1630,1180) ; R5.1 v1(1860,1205)
  Bottom Layer w25: v1(1630,1180) 1655,1205 v1(1860,1205)
NetR9_2: R9.2 U3.1 | length 78.1
  Top Layer w25: R9.2 U3.1
NetR10_1: R10.1 U3.3 | length 772
  Top Layer w25: U3.3 1846.08,1106.24 1898.76,1106.24 v1(1900,1105) ; R10.1 v1(2515,1210)
  Bottom Layer w25: v1(1900,1105) 2080,1105 2185,1210 v1(2515,1210)
NetR12_1: R12.1 USB1.B5 | length 69.2
  Top Layer w10: USB1.B5 362.33,2072.33 362.33,2072.2 R12.1
NetR13_1: R13.1 USB1.A5 | length 70.6
  Top Layer w10: USB1.A5 360.95,2190.44 375,2204.49 R13.1
pump: *.28 R1.1 | length 1283
  Top Layer w25: v2(590,1495) 590,1609.02 *.28 ; v2(1265.48,710.48) 1265,710 1265,677.72 1294.59,648.13 1313.8,648.13 1320,641.93 R1.1
  Bottom Layer w25: v2(590,1495) 590,1440 1265.48,764.52 v2(1265.48,710.48)
PumpBtn: *.14 C9.1 PUMP.2 PUMP.4 R11.4 | length 2265
  Top Layer w10: R11.4 1312,343 1340,315 1700,315 v2(1750,265)
  Top Layer w25: *.14 740.63,869.37 v2(760,850) ; C9.1 1710,205.51 1737.5,233.01 1737.5,252.5 v2(1750,265) PUMP.2 PUMP.2@1760,265
  Top Layer w40: PUMP.2@1755,260 PUMP.4@2085,260
  Bottom Layer w25: v2(760,850) 1240,370 1305,370 1410,265 v2(1750,265)
RTS: Q4.2 R17.1 U5.14 | length 671.9
  Top Layer w10: U5.14 820.98,2174.02 830,2165 830,1725 858.02,1696.98 885.01,1696.98 Q4.2
  Top Layer w25: Q4.2 897.68,1691.2 905.47,1683.41 R17.1
RX: *.35 Led_RX.2 U5.3 | length 881.8
  Top Layer w25: *.35 240.63,1690.63 305,1755 460,1755 520,1815 537.5,1815 550,1827.5 550,1832.5 562.5,1845 565,1845 580,1860 580,2159.38 565.36,2174.02 U5.3
SCL: *.36 LCD_I2C.4 | length 2795.5
  Top Layer w25: v2(190,1535) 190,1609.02 *.36
  Bottom Layer w10: v2(190,1535) 260,1465 420,1465 1340,545 1750,545 2210,85 LCD_I2C.4
SDA: *.33 LCD_I2C.3 | length 2737.9
  Top Layer w25: *.33 340.63,1539.37 v2(355,1525)
  Bottom Layer w10: v2(355,1525) 405,1525 1350,580 1775,580 2175,180 2325,180 LCD_I2C.3@2410,95
"soil moisture": *.6 C3.1 R7.2 | length 391
  Top Layer w25: *.6 340.63,769.37 390,720 R7.2 390.24,639.76 459.76,639.76 C3.1
TX: *.34 Led_TX.2 U5.2 | length 966.7
  Top Layer w25: *.34 290.63,1685.63 310,1705 v2(490,1705) 512.5,1705 550,1742.5 Led_TX.2 ; U5.2 v2(555.98,2224.02)
  Bottom Layer w25: v2(490,1705) 555.98,1770.98 v2(555.98,2224.02)
TYPE_C_D-N: U5.6 USB1.A7 USB1.B7 | length 454.1
  Top Layer w10: USB1.A7 310.34,2130.6 276.46,2130.6 275.86,2130 265.86,2130 260,2135.86 260,2164.9 265.86,2170.76 USB1.B7 394.24,2170.76 415,2150 415,2035 430,2020 493.03,2020 U5.6
TYPE_C_D-P: U5.5 USB1.A6 USB1.B6 | length 285.6
  Top Layer w10: USB1.B6 311.96,2112.48 349.14,2112.48 ; USB1.A6 349.14,2151.07 355,2145.21 355,2118.33 349.14,2112.48 ; v2(380,2115) 377.48,2112.48 349.14,2112.48 ; v2(465.98,2074.02) U5.5
  Bottom Layer w10: v2(380,2115) 425,2115 v2(465.98,2074.02)
VBUS: USB1.A4 USB1.A9 | length 290.4
  Top Layer w10: USB1.A4 305.92,2230.62 273.38,2230.62 235,2192.24 235,2090 271.58,2053.42 304.49,2053.42 USB1.A9
VCC: *.2 AMS1.2 AMS1.4 C7.1 C14.1 C15.1 C16.1 DHT.P$1 R3.1 R6.2 R8.2 R11.5 R11.6 R11.7 R11.8 R15.2 R18.2 R19.2 U5.4 U5.16 | length 5776.1
  Top Layer w10: *.2 v2(140.63,1014.37) ; C7.1 645,2335.47 645,1905 665,1885 759.06,1885 769.53,1874.53 R19.2 R18.2
  Top Layer w25: *.2 140.08,939.8 140.08,855 C15.1@140.08,795 ; R3.1 C15.1@140.08,795 ; R6.2 319.53,640 255,640 144.3,640 129.3,655 DHT.P$1 122.19,657.19 122.19,722.19 140.08,740.08 C15.1@140.08,795 ; C7.1 v2(700,2345) 738.31,2345 743.81,2339.5 752.95,2339.5 785.5,2339.5 865,2260 865,2090.47 903.29,2052.19 903.29,2051.2 909.49,2045 R8.2 ; v2(740,395) 750,385 1080,385 1145.72,450.72 1188.72,450.72 R11.8 1233.92,452 1268.08,452 R11.5 ; U5.16 752.95,2330.36
  Top Layer w40: v2(430,780) 565,780 725,620 C14.1 AMS1.4@803.58,529.53 ; AMS1.4@807.03,532.97 830.83,556.77 AMS1.4 AMS1.2
  Bottom Layer w25: v2(140.63,1014.37) 140.63,1875.63 200,1935 200,2100 445,2345 580,2345 ; v2(497.05,2124.02) 497.05,2262.05 580,2345 ; v2(700,2345) 580,2345 ; v2(740,395) 740,450 v2(815,525)
  Bottom Layer w40: DHT.P$1 305,655 v2(430,780)
pads on no net: *.4 *.5 *.7 *.8 *.9 *.16 *.17 *.18 *.19 *.20 *.21 *.22 *.23 *.24 *.29 *.30 *.31 *.32 *.37 *.39 DHT.P$3 LED1.0 LED2.0 LED3.0 U5.9 U5.10 U5.11 U5.12 U5.15 USB1. USB1.A8 USB1.B8

## Polygon pours and split planes (outlines as drawn)
GND on Bottom Layer "NONET_L-01_P-001" (solid, pour order 0): 20,2380 1020,2380 1020,1392.49 2995,1392.49 2995,20 20,20
GND on Top Layer "GND_L01_P002" (solid, pour order 2): 20,2380 1020,2380 1020,1392.49 2995,1392.49 2995,20 20,20

## Keep-outs
Keep-Out Layer:
  lines w15: 1237.5,1640 1237.5,1475 1312.5,1400 1407.5,1400 1477.5,1470 1477.5,1640 ; 1890,1640 1890,1475 1965,1400 2060,1400 2130,1470 2130,1640 ; 2542.5,1640 2542.5,1475 2617.5,1400 2712.5,1400 2782.5,1470 2782.5,1640
  lines w20: 10,20 ccw(c20,20) 20,10 ; 10,20 ccw(c20,20) 20,10 ; 10,20 10,2380 ; 10,2380 cw(c20,2380) 20,2390 ; 10,2380 cw(c20,2380) 20,2390 ; 20,10 2995,10 ; 20,2390 2995,2390 ; 2995,10 ccw(c2995,20) 3005,20 ; 2995,10 ccw(c2995,20) 3005,20 ; 2995,2390 cw(c2995,2380) 3005,2380 ; 2995,2390 cw(c2995,2380) 3005,2380 ; 3005,20 3005,2380 ; 30,30 30,2370 2985,2370 2985,30 30,30

## Other copper
Bottom Layer:
  region net GND: 2940,600 2940,1025 2640,1025 2640,600

## Silkscreen, mask and mechanical layers (free items; w line width, h text height)
Top Overlay:
  text "3.3 data nc 0" at 175,725 h30 r270
  text "SCL SDA 5  0" at 2260,145 h30

## Text inside footprints (layer, text, board x,y; h text height)
*: Mechanical 13 "ANTENNA" at -56.61,1038.78 h70 r90